# Altium PCB PCB2.PcbDoc
Units mm, origin at the board's own origin, x right, y up, seen from the top; angles counter-clockwise.
Board outline 54.25 x 54.25 mm, 2 copper layers (Top Layer, Bottom Layer); 13 components, 106 nets, 220 pads, 0 vias.
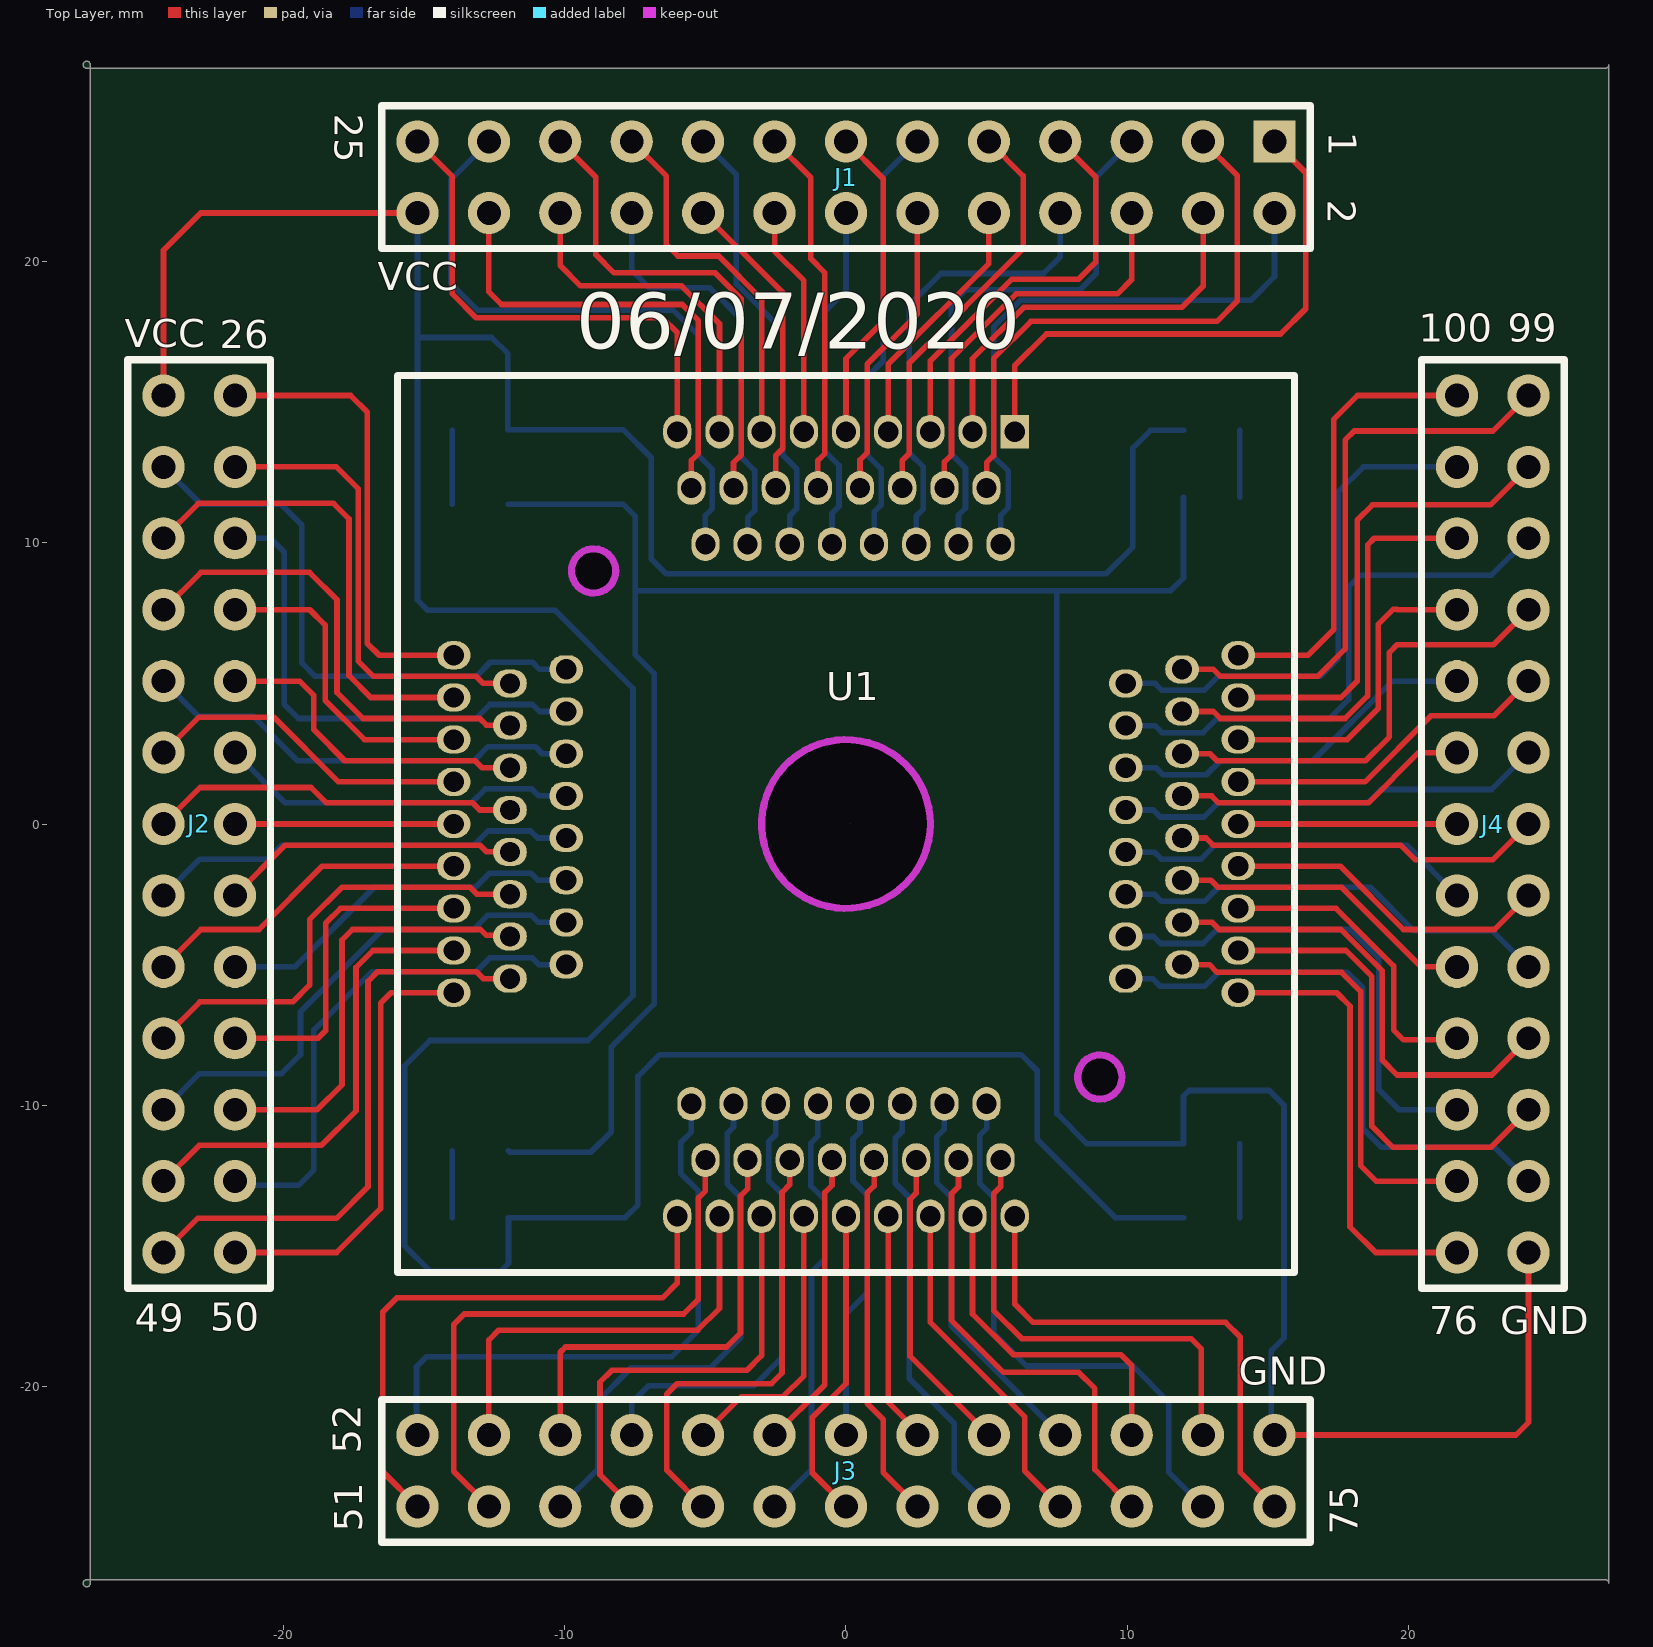
[diagram p0: Top Layer view]
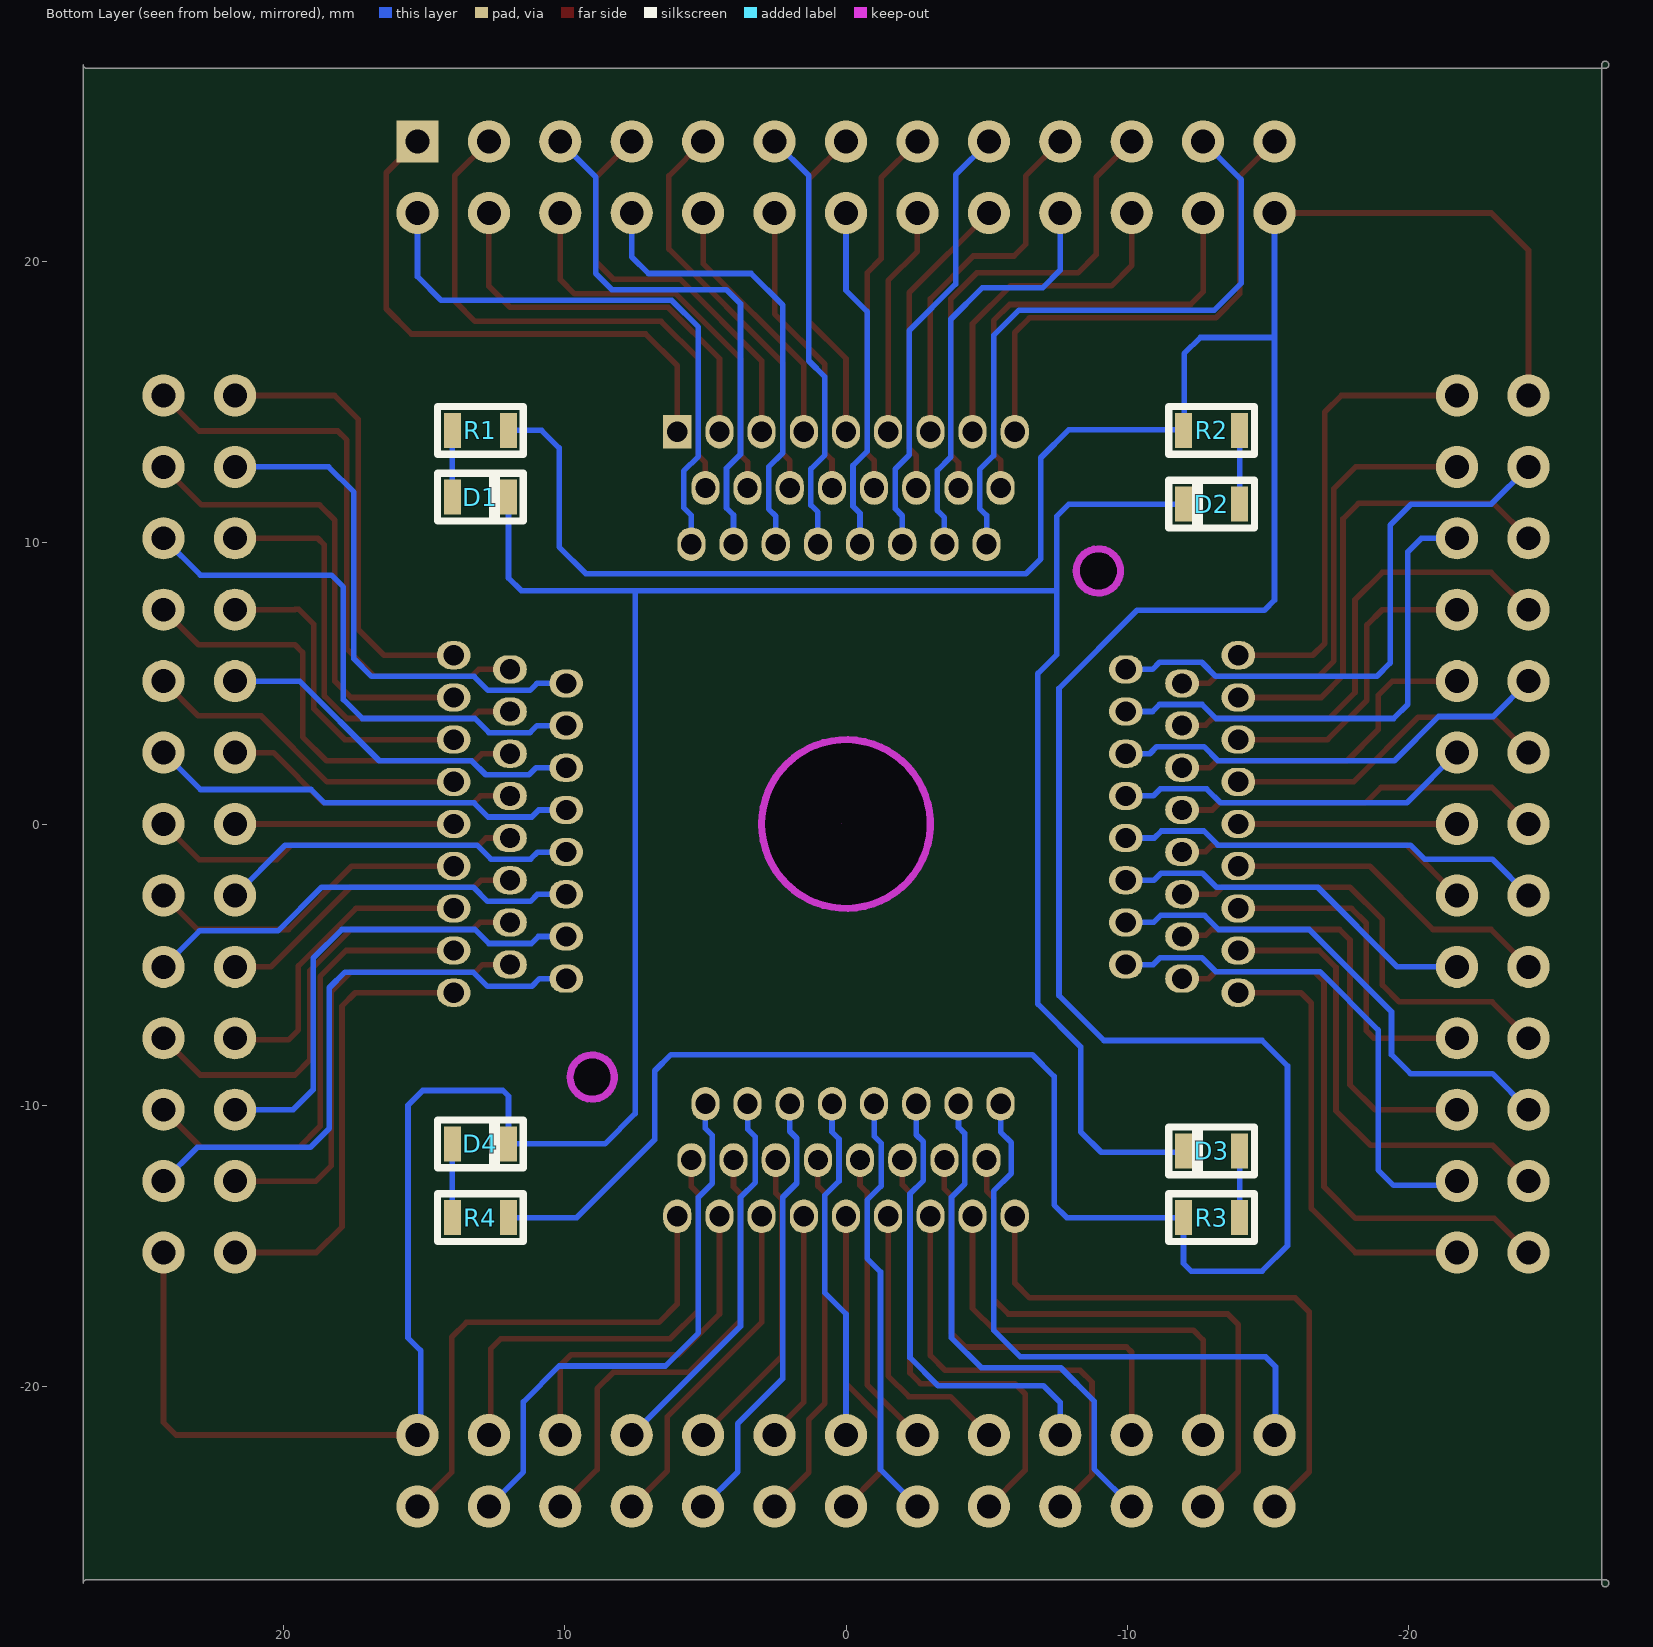
[diagram p1: Bottom Layer view, seen from below]

## Layer stack, top to bottom
Top Solder: solder mask 0.0102, Solder Resist, Dk 3.5
Top Layer: signal copper 0.0356
Dielectric 1: dielectric 0.32, FR-4, Dk 4.8
Bottom Layer: signal copper 0.0356
Bottom Solder: solder mask 0.0102, Solder Resist, Dk 3.5

## Board outline
-27.127,-27 cw(c-27,-27) -27,-26.873 27,-26.873 cw(c27,-27) 27.127,-27 27.127,27 cw(c27,27) 27,26.873 -27,26.873 cw(c-27,27) -27.127,27 cw(c-27,27) -27,27.127 cw(c-27,27) -26.873,27 -26.873,-27 cw(c-27,-27) -27,-27.127 cw(c-27,-27)

## Design rules (kind name [scope] priority, off if disabled: settings)
Clearance [All] p1: gap=0.1 ignorepadtopadclearanceinfootprint=FALSE
PolygonConnect [All] p1: connectstyle=Relief reliefconductorwidth=0.254 reliefentries=4 polygonreliefangle="90 Angle" airgapwidth=0.254
RoutingVias [All] p1: holewidth=0.711 width=1.27 viastyle="Through Hole" minholewidth=0.711 minwidth=1.27 maxholewidth=0.711 maxwidth=1.27
SolderMaskExpansion [All] p1: expansion=0.102
Width [All] p1: maxlimit=0.2 minlimit=0.2 preferedwidth=0.2
30 further rules are at their usual default settings.

## Components (designator, comment, footprint, x,y, rotation, side; value= is the part's Value field where it differs from the comment)
D1 "LED0805" L0805RED 13,11 r180 bottom
D2 "LED0805" L0805RED -13,12 r0 bottom
D3 "LED0805" L0805RED -13,-11 r0 bottom
D4 "LED0805" L0805RED 13,-12 r180 bottom
J1 "Header 13x2 TH Pitch 2.54mm" "Header 13x2 TH Pitch 2.54mm"#1 0,23 r270 top
J2 "Header 13x2 TH Pitch 2.54mm" "Header 13x2 TH Pitch 2.54mm"#2 -23,0 r0 top
J3 "Header 13x2 TH Pitch 2.54mm" "Header 13x2 TH Pitch 2.54mm"#2 0,-23 r90 top
J4 "Header 13x2 TH Pitch 2.54mm" "Header 13x2 TH Pitch 2.54mm"#2 23,0 r180 top
R1 "10k" R0805 12,14 r180 bottom
R2 "10k" R0805 -12,14 r0 bottom
R3 "10k" R0805 -12,-14 r0 bottom
R4 "10k" R0805 12,-14 r180 bottom
U1 "OTQ-100-0.5-12" SOCKET_ENPLAS_OTQ-100-0.5-12 0,0 r90 top

## Footprints (in the part's own frame and the unit in brackets; to place one, negate y for a bottom-side part, rotate by r counter-clockwise, add the part's x,y. Pads: shape width x height; smd on the part's side, far side on the other; paste and mask are expansions set on the pad)
"Header 13x2 TH Pitch 2.54mm"#1 [mm]
  rect 1.5x1.5 hole 0.85: 1(-1.27,15.24)
  round 1.5 hole 0.85: 2(1.27,15.24) 3(-1.27,12.7) 4(1.27,12.7) 5(-1.27,10.16) 6(1.27,10.16) 7(-1.27,7.62) 8(1.27,7.62) 9(-1.27,5.08) 10(1.27,5.08) 11(-1.27,2.54) 12(1.27,2.54) 13(-1.27,0) 14(1.27,0) 15(-1.27,-2.54) 16(1.27,-2.54) 17(-1.27,-5.08) 18(1.27,-5.08) 19(-1.27,-7.62) 20(1.27,-7.62) 21(-1.27,-10.16) 22(1.27,-10.16) 23(-1.27,-12.7) 24(1.27,-12.7) 25(-1.27,-15.24) 26(1.27,-15.24)
  silkscreen extent -2.54,-16.51 2.54,16.51, body extent -2.54,-16.51 2.54,16.51, height 8.89
"Header 13x2 TH Pitch 2.54mm"#2 [mm]
  round 1.5 hole 0.85: 1(-1.27,15.24) 2(1.27,15.24) 3(-1.27,12.7) 4(1.27,12.7) 5(-1.27,10.16) 6(1.27,10.16) 7(-1.27,7.62) 8(1.27,7.62) 9(-1.27,5.08) 10(1.27,5.08) 11(-1.27,2.54) 12(1.27,2.54) 13(-1.27,0) 14(1.27,0) 15(-1.27,-2.54) 16(1.27,-2.54) 17(-1.27,-5.08) 18(1.27,-5.08) 19(-1.27,-7.62) 20(1.27,-7.62) 21(-1.27,-10.16) 22(1.27,-10.16) 23(-1.27,-12.7) 24(1.27,-12.7) 25(-1.27,-15.24) 26(1.27,-15.24)
  silkscreen extent -2.54,-16.51 2.54,16.51, body extent -2.54,-16.51 2.54,16.51, height 8.89
L0805RED [mm]
  rect 0.6x1.24 smd: 1(-1,0.625) 2(1,0.625)
  silkscreen extent -1.53,-0.23 1.52,1.47, body extent -1,0 1,1.25, height 1.1
R0805 [mm]
  rect 0.6x1.24 smd: 1(-2,0) 2(0,0)
  silkscreen extent -2.52,-0.85 0.53,0.85, body extent -2,-0.63 0,0.62, height 0.45
SOCKET_ENPLAS_OTQ-100-0.5-12 [mm]
  rect 1.2x1 hole 0.72: 1(13.95,-6)
  oval 1.2x1 hole 0.72: 2(9.95,-5.5) 3(11.95,-5) 4(13.95,-4.5) 5(9.95,-4) 6(11.95,-3.5) 7(13.95,-3) 8(9.95,-2.5) 9(11.95,-2) 10(13.95,-1.5) 11(9.95,-1) 12(11.95,-0.5) 13(13.95,0) 14(9.95,0.5) 15(11.95,1) 16(13.95,1.5) 17(9.95,2) 18(11.95,2.5) 19(13.95,3) 20(9.95,3.5) 21(11.95,4) 22(13.95,4.5) 23(9.95,5) 24(11.95,5.5) 25(13.95,6) 51(-13.95,6) 52(-9.95,5.5) 53(-11.95,5) 54(-13.95,4.5) 55(-9.95,4) 56(-11.95,3.5) 57(-13.95,3) 58(-9.95,2.5) 59(-11.95,2) 60(-13.95,1.5) 61(-9.95,1) 62(-11.95,0.5) 63(-13.95,0) 64(-9.95,-0.5) 65(-11.95,-1) 66(-13.95,-1.5) 67(-9.95,-2) 68(-11.95,-2.5) 69(-13.95,-3) 70(-9.95,-3.5) 71(-11.95,-4) 72(-13.95,-4.5) 73(-9.95,-5) 74(-11.95,-5.5) 75(-13.95,-6)
  oval 1x1.2 hole 0.72: 26(6,13.95) 27(5.5,9.95) 28(5,11.95) 29(4.5,13.95) 30(4,9.95) 31(3.5,11.95) 32(3,13.95) 33(2.5,9.95) 34(2,11.95) 35(1.5,13.95) 36(1,9.95) 37(0.5,11.95) 38(0,13.95) 39(-0.5,9.95) 40(-1,11.95) 41(-1.5,13.95) 42(-2,9.95) 43(-2.5,11.95) 44(-3,13.95) 45(-3.5,9.95) 46(-4,11.95) 47(-4.5,13.95) 48(-5,9.95) 49(-5.5,11.95) 50(-6,13.95) 76(-6,-13.95) 77(-5.5,-9.95) 78(-5,-11.95) 79(-4.5,-13.95) 80(-4,-9.95) 81(-3.5,-11.95) 82(-3,-13.95) 83(-2.5,-9.95) 84(-2,-11.95) 85(-1.5,-13.95) 86(-1,-9.95) 87(-0.5,-11.95) 88(0,-13.95) 89(0.5,-9.95) 90(1,-11.95) 91(1.5,-13.95) 92(2,-9.95) 93(2.5,-11.95) 94(3,-13.95) 95(3.5,-9.95) 96(4,-11.95) 97(4.5,-13.95) 98(5,-9.95) 99(5.5,-11.95) 100(6,-13.95)
  Keep-Out Layer board cut-out: -9,-9.8 -9.306,-9.739 -9.566,-9.566 -9.739,-9.306 -9.8,-9 -9.8,-9 -9.739,-8.694 -9.566,-8.434 -9.306,-8.261 -9,-8.2 -9,-8.2 -8.694,-8.261 -8.434,-8.434 -8.261,-8.694 -8.2,-9 -8.2,-9 -8.261,-9.306 -8.434,-9.566 -8.694,-9.739 -9,-9.8
  Keep-Out Layer board cut-out: 0,-3 -1.148,-2.772 -2.121,-2.121 -2.772,-1.148 -3,0 -3,0 -2.772,1.148 -2.121,2.121 -1.148,2.772 0,3 0,3 1.148,2.772 2.121,2.121 2.772,1.148 3,0 3,0 2.772,-1.148 2.121,-2.121 1.148,-2.772 0,-3
  Keep-Out Layer board cut-out: 9,8.2 8.694,8.261 8.434,8.434 8.261,8.694 8.2,9 8.2,9 8.261,9.306 8.434,9.566 8.694,9.739 9,9.8 9,9.8 9.306,9.739 9.566,9.566 9.739,9.306 9.8,9 9.8,9 9.739,8.694 9.566,8.434 9.306,8.261 9,8.2
  Keep-Out Layer board cut-out: 0.027,-0.163
  Keep-Out Layer circle w0.254: c0,0 r3
  Keep-Out Layer circle w0.254: c-9,-9.025 r0.786
  Keep-Out Layer circle w0.254: c9,8.975 r0.786
  silkscreen extent -15.95,-15.95 15.95,15.95

## Part data
R1 R2 R3 R4: library part "Resistor SMD"
U1: library part SOCKET_ENPLAS_OTQ-100-0.5-12

## Nets (pads, with @x,y where several pads share a name; then routed paths per layer and width w, separated by ;. In a path a pad name is that pad's centre, name@x,y a point inside that pad or via, vN(x,y) a via of type N, cw(c..) or ccw(c..) an arc to the next point about the centre after c; other vN are vias at no path point)
GND: D1.2 D2.2 D3.2 D4.2 J3.26 J4.1 | length 110.3
  Top Layer w0.2: J3.26 23.82,-21.73 24.27,-21.28 J4.1
  Bottom Layer w0.2: D3.2 -11.95,-11.675 -9.075,-11.675 -8.35,-10.95 -8.35,-7.925 -6.825,-6.4 -6.825,5.35 -7.5,6.025 -7.5,10.95 -7.925,11.375 D2.2 ; -7.475,8.3 11.55,8.3 12,8.75 D1.2 ; 7.5,8.25 7.5,-10.3 8.575,-11.375 D4.2 12,-9.675 12.2,-9.475 15.05,-9.475 15.575,-10 15.575,-18.275 15.125,-18.725 15.125,-21.615 J3.26
NetD1_1: D1.1 R1.1 | length 2.4
  Bottom Layer w0.2: D1.1 R1.1
NetD2_1: D2.1 R2.1 | length 2.6
  Bottom Layer w0.2: D2.1 R2.1
NetD3_1: D3.1 R3.1 | length 2.4
  Bottom Layer w0.2: R3.1 D3.1
NetD4_1: D4.1 R4.1 | length 2.6
  Bottom Layer w0.2: R4.1 D4.1
PIN1: J1.1 U1.1 | length 19.9
  Top Layer w0.2: U1.1 6,16.3 7.125,17.425 15.45,17.425 16.35,18.325 16.35,23.16 J1.1
PIN2: J1.2 U1.2 | length 21.1
  Bottom Layer w0.2: U1.2 5.5,10.975 5.775,11.25 5.775,12.55 5.25,13.075 5.25,17.675 6.2,18.625 14.4,18.625 15.24,19.465 J1.2
PIN3: J1.3 U1.3 | length 20.4
  Top Layer w0.2: U1.3 5,12.85 5.25,13.1 5.25,16.55 6.575,17.875 13.19,17.875 13.915,18.6 13.915,23.055 J1.3
PIN4: J1.4 U1.4 | length 14.5
  Top Layer w0.2: U1.4 4.5,16.55 6.325,18.375 11.95,18.375 12.7,19.125 J1.4
PIN5: J1.5 U1.5 | length 19.7
  Bottom Layer w0.2: U1.5 4,10.989 4.25,11.239 4.25,12.65 3.75,13.15 3.75,18.5 4.25,19 8.325,19 8.9,19.575 8.9,23.01 J1.5
PIN6: J1.6 U1.6 | length 14.6
  Top Layer w0.2: U1.6 3.5,12.875 3.75,13.125 3.75,16.55 6.05,18.85 9.65,18.85 10.16,19.36 J1.6
PIN7: J1.7 U1.7 | length 14.7
  Top Layer w0.2: U1.7 3,16.475 5.9,19.375 8.275,19.375 8.875,19.975 8.875,23.015 J1.7
PIN8: J1.8 U1.8 | length 16.5
  Bottom Layer w0.2: U1.8 2.5,10.95 2.75,11.2 2.75,12.7 2.25,13.2 2.25,18.45 3.375,19.575 7.025,19.575 7.62,20.17 J1.8
PIN9: J1.9 U1.9 | length 14.6
  Top Layer w0.2: U1.9 2,12.925 2.25,13.175 2.25,16.4 6.3,20.45 6.3,23.05 J1.9
PIN10: J1.10 U1.10 | length 9.3
  Top Layer w0.2: U1.10 1.5,16.35 5.08,19.93 J1.10
PIN11: J1.11 U1.11 | length 15.4
  Bottom Layer w0.2: U1.11 1,11.089 1.25,11.339 1.25,12.625 0.75,13.125 0.75,15.9 1.325,16.475 1.325,23.055 J1.11
PIN12: J1.12 U1.12 | length 10.6
  Top Layer w0.2: U1.12 0.5,12.95 0.75,13.2 0.75,16.35 2.54,18.14 J1.12
PIN13: J1.13 U1.13 | length 11.4
  Top Layer w0.2: U1.13 0,16.55 1.325,17.875 1.325,22.945 J1.13
PIN14: J1.14 U1.14 | length 12.4
  Bottom Layer w0.2: U1.14 -0.5,11.05 -0.25,11.3 -0.25,12.75 -0.75,13.25 -0.75,18.225 0,18.975 J1.14
PIN15: J1.15 U1.15 | length 13.2
  Top Layer w0.2: J1.15 -1.25,22.98 -1.25,20.1 -0.75,19.6 -0.75,13.175 -1,12.925 U1.15
PIN16: J1.16 U1.16 | length 8.2
  Top Layer w0.2: J1.16 -2.54,20.365 -1.5,19.325 U1.16
PIN17: J1.17 U1.17 | length 15.8
  Bottom Layer w0.2: J1.17 -3.9,23.09 -3.9,19.2 -2.25,17.55 -2.25,13.125 -1.75,12.625 -1.75,11.214 -2,10.964 U1.17
PIN18: J1.18 U1.18 | length 11.1
  Top Layer w0.2: J1.18 -2.25,18.9 -2.25,13.351 -2.5,13.101 U1.18
PIN19: J1.19 U1.19 | length 13.1
  Top Layer w0.2: J1.19 -6.387,23.038 -6.387,20.612 -5.975,20.2 -4.525,20.2 -3,18.675 U1.19
PIN20: J1.20 U1.20 | length 15
  Bottom Layer w0.2: J1.20 -7.62,19.695 -7,19.075 -4.85,19.075 -3.725,17.95 -3.725,13.05 -3.25,12.575 -3.25,11.15 -3.5,10.9 U1.20
PIN21: J1.21 U1.21 | length 17.2
  Top Layer w0.2: J1.21 -8.9,23.01 -8.9,20.25 -8.25,19.6 -4.65,19.6 -3.725,18.675 -3.725,13.125 -4,12.85 U1.21
PIN22: J1.22 U1.22 | length 12.2
  Top Layer w0.2: J1.22 -10.16,19.86 -9.438,19.138 -5.85,19.138 -4.5,17.788 -4.5,17.225 U1.22
PIN23: J1.23 U1.23 | length 22.9
  Bottom Layer w0.2: J1.23 -14.05,22.92 -14.05,19.225 -13.1,18.275 -6.15,18.275 -5.25,17.375 -5.25,13.1 -4.75,12.6 -4.75,11.225 -5,10.975 U1.23
PIN24: J1.24 U1.24 | length 16.7
  Top Layer w0.2: J1.24 -12.7,18.925 -12.25,18.475 -5.825,18.475 -5.25,17.9 -5.25,13.175 -5.5,12.925 U1.24
PIN25: J1.25 U1.25 | length 18
  Top Layer w0.2: J1.25 -14,23.03 -14,18.85 -13.15,18 -6.525,18 -6,17.475 U1.25
PIN26: J2.2 U1.26 | length 16.4
  Top Layer w0.2: J2.2 -17.615,15.24 -17.025,14.65 -17.025,6.425 -16.6,6 U1.26
PIN27: J2.3 U1.27 | length 20.6
  Bottom Layer w0.2: J2.3 -22.945,11.375 -20.1,11.375 -19.35,10.625 -19.35,5.725 -18.875,5.25 -13.15,5.25 -12.65,5.75 -11.15,5.75 -10.9,5.5 U1.27
PIN28: J2.4 U1.28 | length 16.6
  Top Layer w0.2: J2.4 -18.125,12.7 -17.35,11.925 -17.35,5.8 -16.8,5.25 -13.15,5.25 -12.9,5 U1.28
PIN29: J2.5 U1.29 | length 17
  Top Layer w0.2: J2.5 -23.03,11.4 -18.225,11.4 -17.675,10.85 -17.675,5.275 -16.9,4.5 U1.29
PIN30: J2.6 U1.30 | length 17.9
  Bottom Layer w0.2: J2.6 -20.46,10.16 -19.975,9.675 -19.975,4.25 -19.475,3.75 -13.163,3.75 -12.663,4.25 -11.15,4.25 -10.9,4 U1.30
PIN31: J2.7 U1.31 | length 17.1
  Top Layer w0.2: J2.7 -22.94,8.95 -19.075,8.95 -18.1,7.975 -18.1,4.675 -17.175,3.75 -13.025,3.75 -12.79,3.515 -11.965,3.515 U1.31
PIN32: J2.8 U1.32 | length 11.3
  Top Layer w0.2: J2.8 -19.07,7.62 -18.525,7.075 -18.525,4.4 -17.125,3 U1.32
PIN33: J2.9 U1.33 | length 15.8
  Bottom Layer w0.2: J2.9 -23.015,3.825 -21.075,3.825 -19.5,2.25 -13.225,2.25 -12.725,2.75 -11.05,2.75 -10.8,2.5 U1.33
PIN34: J2.10 U1.34 | length 11.8
  Top Layer w0.2: J2.10 -19.43,5.08 -18.925,4.575 -18.925,3.35 -17.825,2.25 -13.189,2.25 -12.939,2 U1.34
PIN35: J2.11 U1.35 | length 11.8
  Top Layer w0.2: J2.11 -23.01,3.8 -20.35,3.8 -18.05,1.5 U1.35
PIN36: J2.12 U1.36 | length 12.8
  Bottom Layer w0.2: J2.12 -19.94,0.75 -13.325,0.75 -12.825,1.25 -11.175,1.25 -10.925,1 U1.36
PIN37: J2.13 U1.37 | length 13.2
  Top Layer w0.2: J2.13 -22.97,1.3 -19.025,1.3 -18.475,0.75 -13.275,0.75 -13.025,0.5 U1.37
PIN38: J2.14 U1.38 | length 7.8
  Top Layer w0.2: J2.14 U1.38
PIN39: J2.15 U1.39 | length 15.4
  Bottom Layer w0.2: J2.15 -22.98,-1.25 -20.575,-1.25 -20.075,-0.75 -13.225,-0.75 -12.725,-0.25 -11.214,-0.25 -10.964,-0.5 U1.39
PIN40: J2.16 U1.40 | length 10.6
  Top Layer w0.2: J2.16 -19.94,-0.75 -13.025,-0.75 -12.79,-0.985 -11.965,-0.985 U1.40
PIN41: J2.17 U1.41 | length 11.8
  Top Layer w0.2: J2.17 -22.94,-3.75 -20.875,-3.75 -18.625,-1.5 U1.41
PIN42: J2.18 U1.42 | length 13.3
  Bottom Layer w0.2: J2.18 -19.605,-5.08 -16.775,-2.25 -13.175,-2.25 -12.675,-1.75 -11.2,-1.75 -10.95,-2 U1.42
PIN43: J2.19 U1.43 | length 16
  Top Layer w0.2: J2.19 -22.975,-6.325 -19.675,-6.325 -19.075,-5.725 -19.075,-3.4 -17.925,-2.25 -13.375,-2.25 -13.125,-2.5 U1.43
PIN44: J2.20 U1.44 | length 11.9
  Top Layer w0.2: J2.20 -18.77,-7.62 -18.5,-7.35 -18.5,-3.525 -17.975,-3 U1.44
PIN45: J2.21 U1.45 | length 18.2
  Bottom Layer w0.2: J2.21 -22.985,-8.875 -20.075,-8.875 -19.4,-8.2 -19.4,-6.675 -16.475,-3.75 -13.25,-3.75 -12.75,-3.25 -11.189,-3.25 -10.939,-3.5 U1.45
PIN46: J2.22 U1.46 | length 15.6
  Top Layer w0.2: J2.22 -18.81,-10.16 -17.925,-9.275 -17.925,-4.125 -17.55,-3.75 -13,-3.75 -12.79,-3.96 -11.99,-3.96 U1.46
PIN47: J2.23 U1.47 | length 16.7
  Top Layer w0.2: J2.23 -22.995,-11.425 -18.65,-11.425 -17.425,-10.2 -17.425,-5.1 -16.825,-4.5 U1.47
PIN48: J2.24 U1.48 | length 18.2
  Bottom Layer w0.2: J2.24 -21.58,-12.85 -19.475,-12.85 -18.925,-12.3 -18.925,-7.325 -16.85,-5.25 -13.15,-5.25 -12.65,-4.75 -11.175,-4.75 -10.925,-5 U1.48
PIN49: J2.25 U1.49 | length 20.8
  Top Layer w0.2: J2.25 -23.055,-14.025 -18.125,-14.025 -17,-12.9 -17,-5.6 -16.65,-5.25 -13.15,-5.25 -12.9,-5.5 U1.49
PIN50: J2.26 U1.50 | length 15.9
  Top Layer w0.2: J2.26 -18.115,-15.24 -16.55,-13.675 -16.55,-6.375 -16.175,-6 U1.50
PIN51: J3.1 U1.51 | length 20.7
  Top Layer w0.2: J3.1 -16.475,-23.035 -16.475,-17.35 -15.975,-16.85 -6.525,-16.85 -6,-16.325 U1.51
PIN52: J3.2 U1.52 | length 21.5
  Bottom Layer w0.2: J3.2 -15.275,-21.695 -15.275,-19.3 -14.925,-18.95 -6.2,-18.95 -5.25,-18 -5.25,-13.05 -5.875,-12.425 -5.875,-11.325 -5.5,-10.95 U1.52
PIN53: J3.3 U1.53 | length 21.1
  Top Layer w0.2: J3.3 -13.95,-23.02 -13.95,-17.8 -13.575,-17.425 -5.775,-17.425 -5.25,-16.9 -5.25,-13.3 -5,-13.05 U1.53
PIN54: J3.4 U1.54 | length 15.3
  Top Layer w0.2: J3.4 -12.7,-18.35 -12.35,-18 -5.275,-18 -4.5,-17.225 U1.54
PIN55: J3.5 U1.55 | length 18.9
  Bottom Layer w0.2: J3.5 -8.825,-22.935 -8.825,-20.525 -7.638,-19.338 -4.813,-19.338 -3.75,-18.275 -3.75,-13.275 -4.225,-12.8 -4.225,-11 -4,-10.775 U1.55
PIN56: J3.6 U1.56 | length 15.9
  Top Layer w0.2: J3.6 -10.16,-18.785 -9.975,-18.6 -4.25,-18.6 -3.75,-18.1 -3.75,-13.225 -3.5,-12.975 U1.56
PIN57: J3.7 U1.57 | length 16
  Top Layer w0.2: J3.7 -8.75,-23.14 -8.75,-19.85 -8.325,-19.425 -3.525,-19.425 -3,-18.9 U1.57
PIN58: J3.8 U1.58 | length 16.5
  Bottom Layer w0.2: J3.8 -7.62,-20.57 -7.025,-19.975 -3.275,-19.975 -2.275,-18.975 -2.275,-13.15 -2.75,-12.675 -2.75,-11.3 -2.5,-11.05 U1.58
PIN59: J3.9 U1.59 | length 16.6
  Top Layer w0.2: J3.9 -6.375,-22.975 -6.375,-20.275 -6,-19.9 -2.65,-19.9 -2.275,-19.525 -2.275,-13.1 -2,-12.825 U1.59
PIN60: J3.10 U1.60 | length 10.1
  Top Layer w0.2: J3.10 -3.712,-20.363 -2.238,-20.363 -1.5,-19.625 U1.60
PIN61: J3.11 U1.61 | length 15.4
  Bottom Layer w0.2: J3.11 -1.225,-22.955 -1.225,-15.925 -0.75,-15.45 -0.75,-13.375 -1.25,-12.875 -1.25,-11.35 -1,-11.1 U1.61
PIN62: J3.12 U1.62 | length 10.6
  Top Layer w0.2: J3.12 -0.75,-19.94 -0.75,-13.1 -0.5,-12.85 U1.62
PIN63: J3.13 U1.63 | length 11.3
  Top Layer w0.2: J3.13 -1.2,-23.07 -1.2,-21.1 0,-19.9 U1.63
PIN64: J3.14 U1.64 | length 12.4
  Bottom Layer w0.2: J3.14 0,-17.425 0.75,-16.675 0.75,-13.2 0.25,-12.7 0.25,-11.2 0.5,-10.95 U1.64
PIN65: J3.15 U1.65 | length 13.2
  Top Layer w0.2: U1.65 1,-12.875 0.75,-13.125 0.75,-20.6 1.325,-21.175 1.325,-23.055 J3.15
PIN66: J3.16 U1.66 | length 8.2
  Top Layer w0.2: U1.66 1.5,-20.557 2.54,-21.597 J3.16
PIN67: J3.17 U1.67 | length 15.8
  Bottom Layer w0.2: U1.67 2,-10.925 1.75,-11.175 1.75,-12.775 2.25,-13.275 2.25,-19.725 3.85,-21.325 3.85,-23.04 J3.17
PIN68: J3.18 U1.68 | length 11
  Top Layer w0.2: U1.68 2.5,-13.125 2.275,-13.35 2.275,-18.925 J3.18
PIN69: J3.19 U1.69 | length 12.2
  Top Layer w0.2: U1.69 3,-17.725 6.35,-21.075 6.35,-23 J3.19
PIN70: J3.20 U1.70 | length 13.7
  Bottom Layer w0.2: U1.70 3.5,-10.85 3.225,-11.125 3.225,-12.75 3.75,-13.275 3.75,-17.86 J3.20
PIN71: J3.21 U1.71 | length 16.6
  Top Layer w0.2: U1.71 4,-12.9 3.75,-13.15 3.75,-17.65 5.6,-19.5 8.275,-19.5 8.85,-20.075 8.85,-22.96 J3.21
PIN72: J3.22 U1.72 | length 12.4
  Top Layer w0.2: U1.72 4.5,-17.425 5.95,-18.875 9.775,-18.875 10.16,-19.26 J3.22
PIN73: J3.23 U1.73 | length 19.9
  Bottom Layer w0.2: U1.73 5,-10.825 4.75,-11.075 4.75,-12.775 5.25,-13.275 5.25,-18.1 6.425,-19.275 10.2,-19.275 11.475,-20.55 11.475,-23.045 J3.23
PIN74: J3.24 U1.74 | length 16.5
  Top Layer w0.2: U1.74 5.5,-12.9 5.25,-13.15 5.25,-17.3 6.25,-18.3 12.275,-18.3 12.64,-18.665 12.64,-21.67 J3.24
PIN75: J3.25 U1.75 | length 18.2
  Top Layer w0.2: U1.75 6,-17.075 6.65,-17.725 13.5,-17.725 14.025,-18.25 14.025,-23.055 J3.25
PIN76: J4.2 U1.76 | length 16.2
  Top Layer w0.2: U1.76 17.45,-6 17.925,-6.475 17.925,-14.325 18.84,-15.24 J4.2
PIN77: J4.3 U1.77 | length 20.7
  Bottom Layer w0.2: U1.77 10.9,-5.5 11.175,-5.775 12.75,-5.775 13.25,-5.275 17.675,-5.275 17.684,-5.266 17.816,-5.266 18.375,-5.825 18.375,-10.825 19.05,-11.5 23.07,-11.5 J4.3
PIN78: J4.4 U1.78 | length 16.6
  Top Layer w0.2: U1.78 12.925,-5 13.2,-5.275 17.625,-5.275 18.3,-5.95 18.3,-12.15 18.85,-12.7 J4.4
PIN79: J4.5 U1.79 | length 16.9
  Top Layer w0.2: U1.79 17.775,-4.5 18.7,-5.425 18.7,-10.75 19.45,-11.5 22.93,-11.5 J4.5
PIN80: J4.6 U1.80 | length 17.5
  Bottom Layer w0.2: U1.80 10.939,-4 11.189,-4.25 12.7,-4.25 13.2,-3.75 17.925,-3.75 18.95,-4.775 18.95,-9.45 19.66,-10.16 J4.6
PIN81: J4.7 U1.81 | length 17
  Top Layer w0.2: U1.81 13.025,-3.5 13.275,-3.75 17.6,-3.75 19.075,-5.225 19.075,-8.4 19.6,-8.925 22.965,-8.925 J4.7
PIN82: J4.8 U1.82 | length 11.1
  Top Layer w0.2: U1.82 17.425,-3 19.475,-5.05 19.475,-7.325 19.825,-7.675 21.675,-7.675 J4.8
PIN83: J4.9 U1.83 | length 15.8
  Bottom Layer w0.2: U1.83 10.975,-2.5 11.225,-2.75 12.75,-2.75 13.25,-2.25 18.65,-2.25 20.2,-3.8 22.99,-3.8 J4.9
PIN84: J4.10 U1.84 | length 11.1
  Top Layer w0.2: U1.84 12.975,-2 13.225,-2.25 17.625,-2.25 20.455,-5.08 J4.10
PIN85: J4.11 U1.85 | length 11.8
  Top Layer w0.2: U1.85 17.575,-1.5 19.825,-3.75 23.06,-3.75 J4.11
PIN86: J4.12 U1.86 | length 12.8
  Bottom Layer w0.2: U1.86 10.964,-1 11.214,-1.25 12.625,-1.25 13.125,-0.75 19.94,-0.75 J4.12
PIN87: J4.13 U1.87 | length 13.2
  Top Layer w0.2: U1.87 12.8,-0.5 13.05,-0.75 19.725,-0.75 20.25,-1.275 22.995,-1.275 J4.13
PIN88: J4.14 U1.88 | length 7.8
  Top Layer w0.2: U1.88 J4.14
PIN89: J4.15 U1.89 | length 15.4
  Bottom Layer w0.2: U1.89 10.925,0.5 11.175,0.25 12.725,0.25 13.225,0.75 18.55,0.75 19.025,1.225 22.955,1.225 J4.15
PIN90: J4.16 U1.90 | length 10.6
  Top Layer w0.2: U1.90 13.001,1 13.251,0.75 18.575,0.75 20.365,2.54 J4.16
PIN91: J4.17 U1.91 | length 11.8
  Top Layer w0.2: U1.91 18.45,1.5 20.8,3.85 23.04,3.85 J4.17
PIN92: J4.18 U1.92 | length 13.3
  Bottom Layer w0.2: U1.92 11.026,2 11.276,1.75 12.812,1.75 13.312,2.25 16.6,2.25 19.43,5.08 J4.18
PIN93: J4.19 U1.93 | length 16.4
  Top Layer w0.2: U1.93 12.95,2.5 13.2,2.25 18.475,2.25 19.325,3.1 19.325,6.1 19.6,6.375 23.025,6.375 J4.19
PIN94: J4.20 U1.94 | length 11.5
  Top Layer w0.2: U1.94 17.825,3 18.925,4.1 18.925,7.1 19.459,7.634 19.591,7.634 19.605,7.62 J4.20
PIN95: J4.21 U1.95 | length 19.6
  Bottom Layer w0.2: U1.95 10.989,3.5 11.239,3.25 12.7,3.25 13.2,3.75 17.2,3.75 17.875,4.425 17.875,8.425 18.3,8.85 22.96,8.85 J4.21
PIN96: J4.22 U1.96 | length 15.7
  Top Layer w0.2: U1.96 13.064,4 13.314,3.75 17.75,3.75 18.55,4.55 18.55,9.925 18.785,10.16 J4.22
PIN97: J4.23 U1.97 | length 17.1
  Top Layer w0.2: U1.97 17.6,4.5 18.175,5.075 18.175,10.8 18.725,11.35 22.92,11.35 J4.23
PIN98: J4.24 U1.98 | length 18.6
  Bottom Layer w0.2: U1.98 10.989,5 11.239,4.75 12.725,4.75 13.225,5.25 16.875,5.25 17.5,5.875 17.5,11.8 18.4,12.7 J4.24
PIN99: J4.25 U1.99 | length 20.9
  Top Layer w0.2: U1.99 13.064,5.5 13.314,5.25 16.775,5.25 17.75,6.225 17.75,13.65 18.075,13.975 23.005,13.975 J4.25
PIN100: J4.26 U1.100 | length 16
  Top Layer w0.2: U1.100 16.425,6 17.35,6.925 17.35,14.4 18.19,15.24 J4.26
VCC: J1.26 J2.1 R1.2 R2.2 R3.2 R4.2 | length 141.3
  Top Layer w0.2: J2.1 -24.27,20.405 -22.945,21.73 J1.26
  Bottom Layer w0.2: J1.26 -15.24,7.96 -14.879,7.6 -10.35,7.6 -7.575,4.825 -7.575,-6.1 -9.175,-7.7 -14.8,-7.7 -15.7,-8.6 -15.7,-15 -14.8,-15.9 -12.275,-15.9 -12,-15.625 R3.2 -7.85,-14 -7.4,-13.55 -7.4,-8.975 -6.625,-8.2 6.225,-8.2 6.8,-8.775 6.8,-11.225 9.575,-14 R4.2 ; -15.225,17.3 -12.6,17.3 -12.025,16.725 -12.025,14.025 -7.925,14.025 -6.925,13.025 -6.925,9.425 -6.4,8.9 9.25,8.9 10.2,9.85 10.2,13.375 10.825,14 R1.2

## Silkscreen, mask and mechanical layers (free items; w line width, h text height)
Top Overlay:
  text "25" at -18.175,25.25 h1 r270
  text "1" at 17.175,24.625 h1 r270
  text "2" at 17.125,22.2 h1 r270
  text "VCC" at -16.65,18.975 h1
  text "100" at 20.375,17.15 h1
  text "99" at 23.525,17.15 h1
  text "VCC" at -25.65,16.95 h1
  text "26" at -22.275,16.925 h1
  text "06/07/2020" at -9.6,16.9 h2
  text "50" at -22.6,-18.025 h1
  text "49" at -25.3,-18.05 h1
  text "76" at 20.75,-18.15 h1
  text "GND" at 23.275,-18.15 h1
  text "GND" at 13.975,-19.95 h1
  text "52" at -17.25,-22.4 h1 r90
  text "51" at -17.2,-25.175 h1 r90
  text "75" at 18.2,-25.275 h1 r90
Mechanical 1:
  lines w0.254: -27,-27 -27,27 27,27 27,-27 -27,-27